# Altium PCB PIR_Sensor_Sheet_V1.3.1_Nov2023.PcbDoc
Units mm, origin at the board's own origin, x right, y up, seen from the top; angles counter-clockwise.
Board outline 292.87 x 238.1 mm, 2 copper layers (Top Layer, Bottom Layer); 15 components, 0 nets, 38 pads, 0 vias.
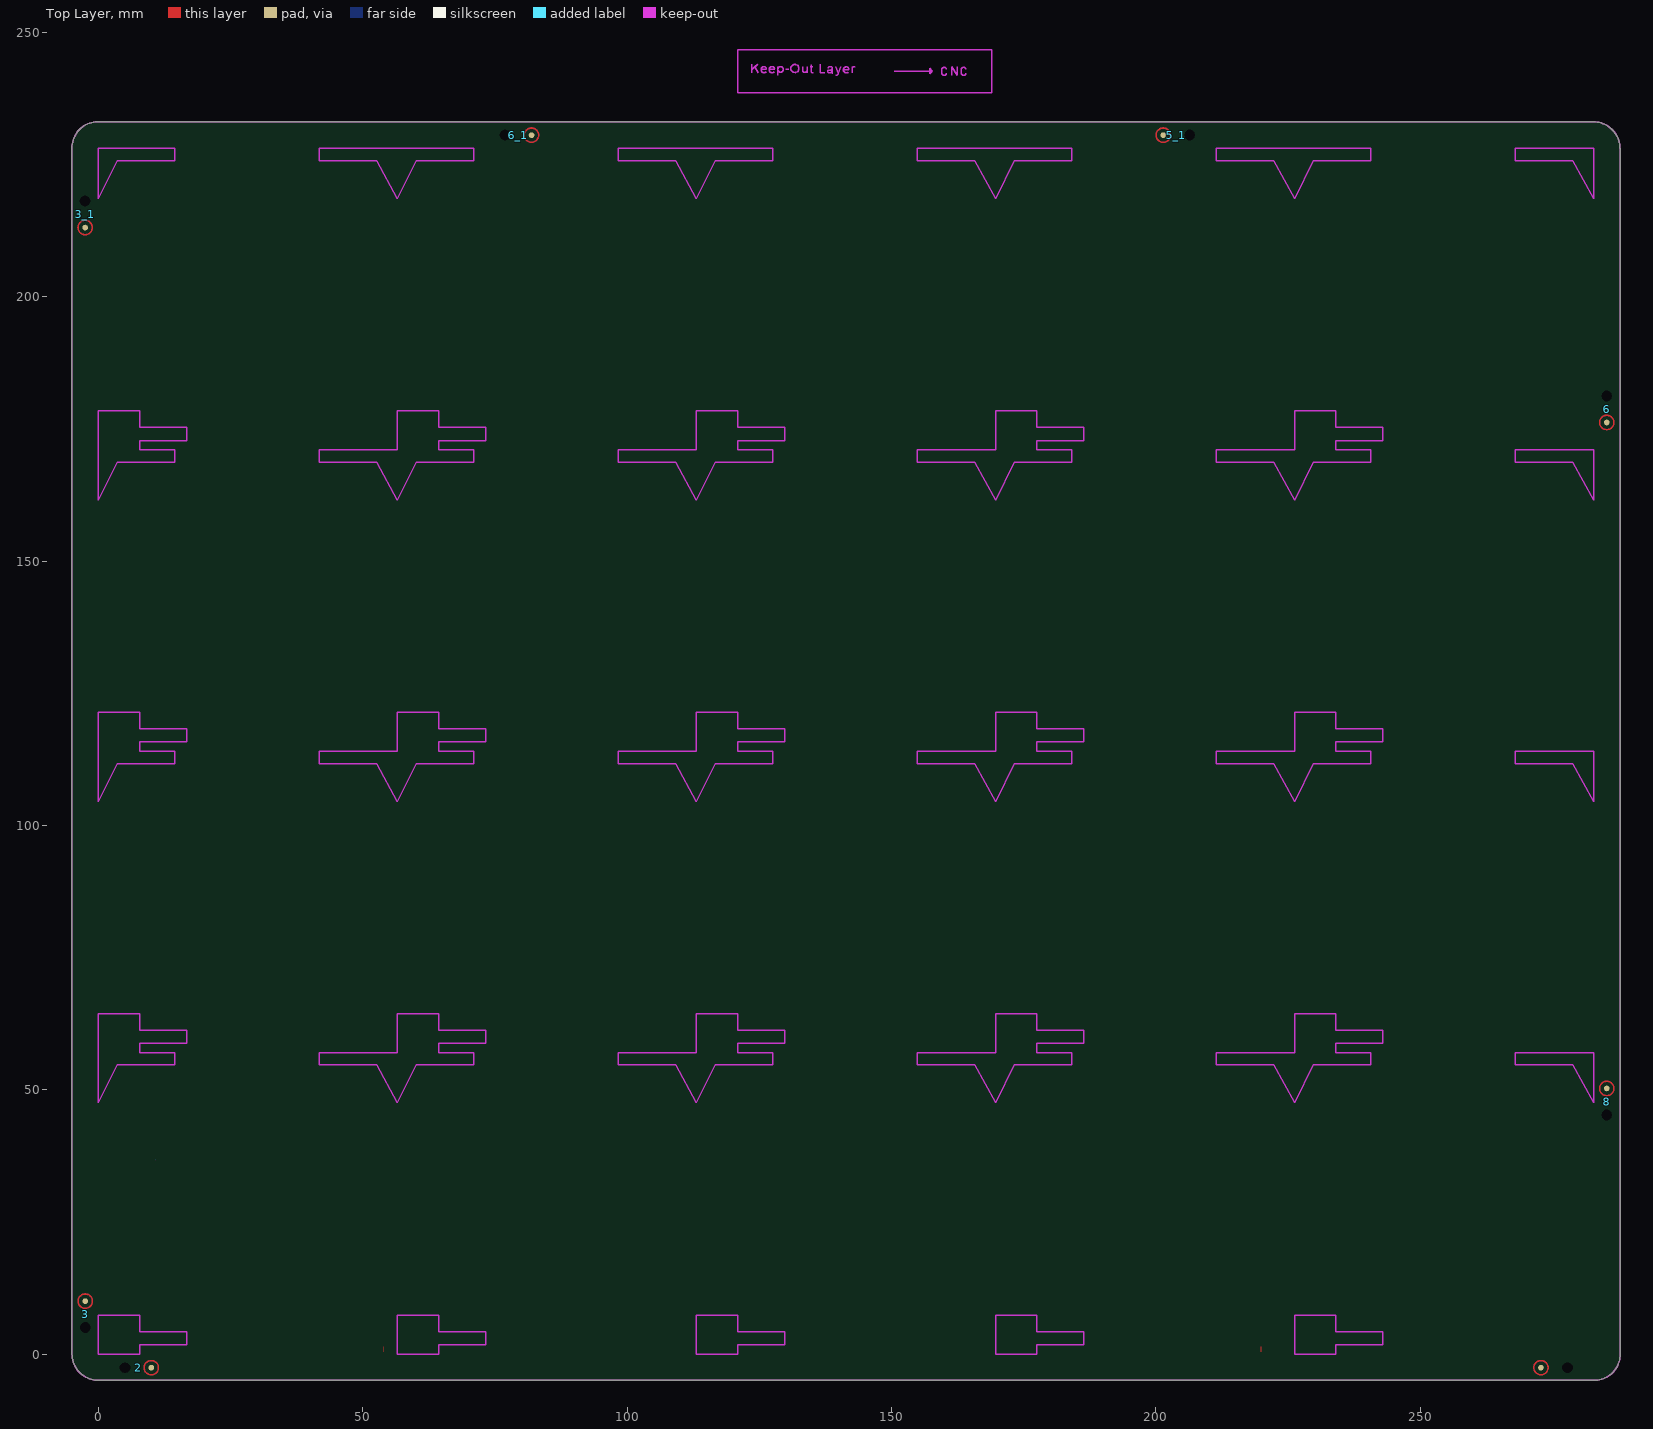
[diagram p0: Top Layer view]
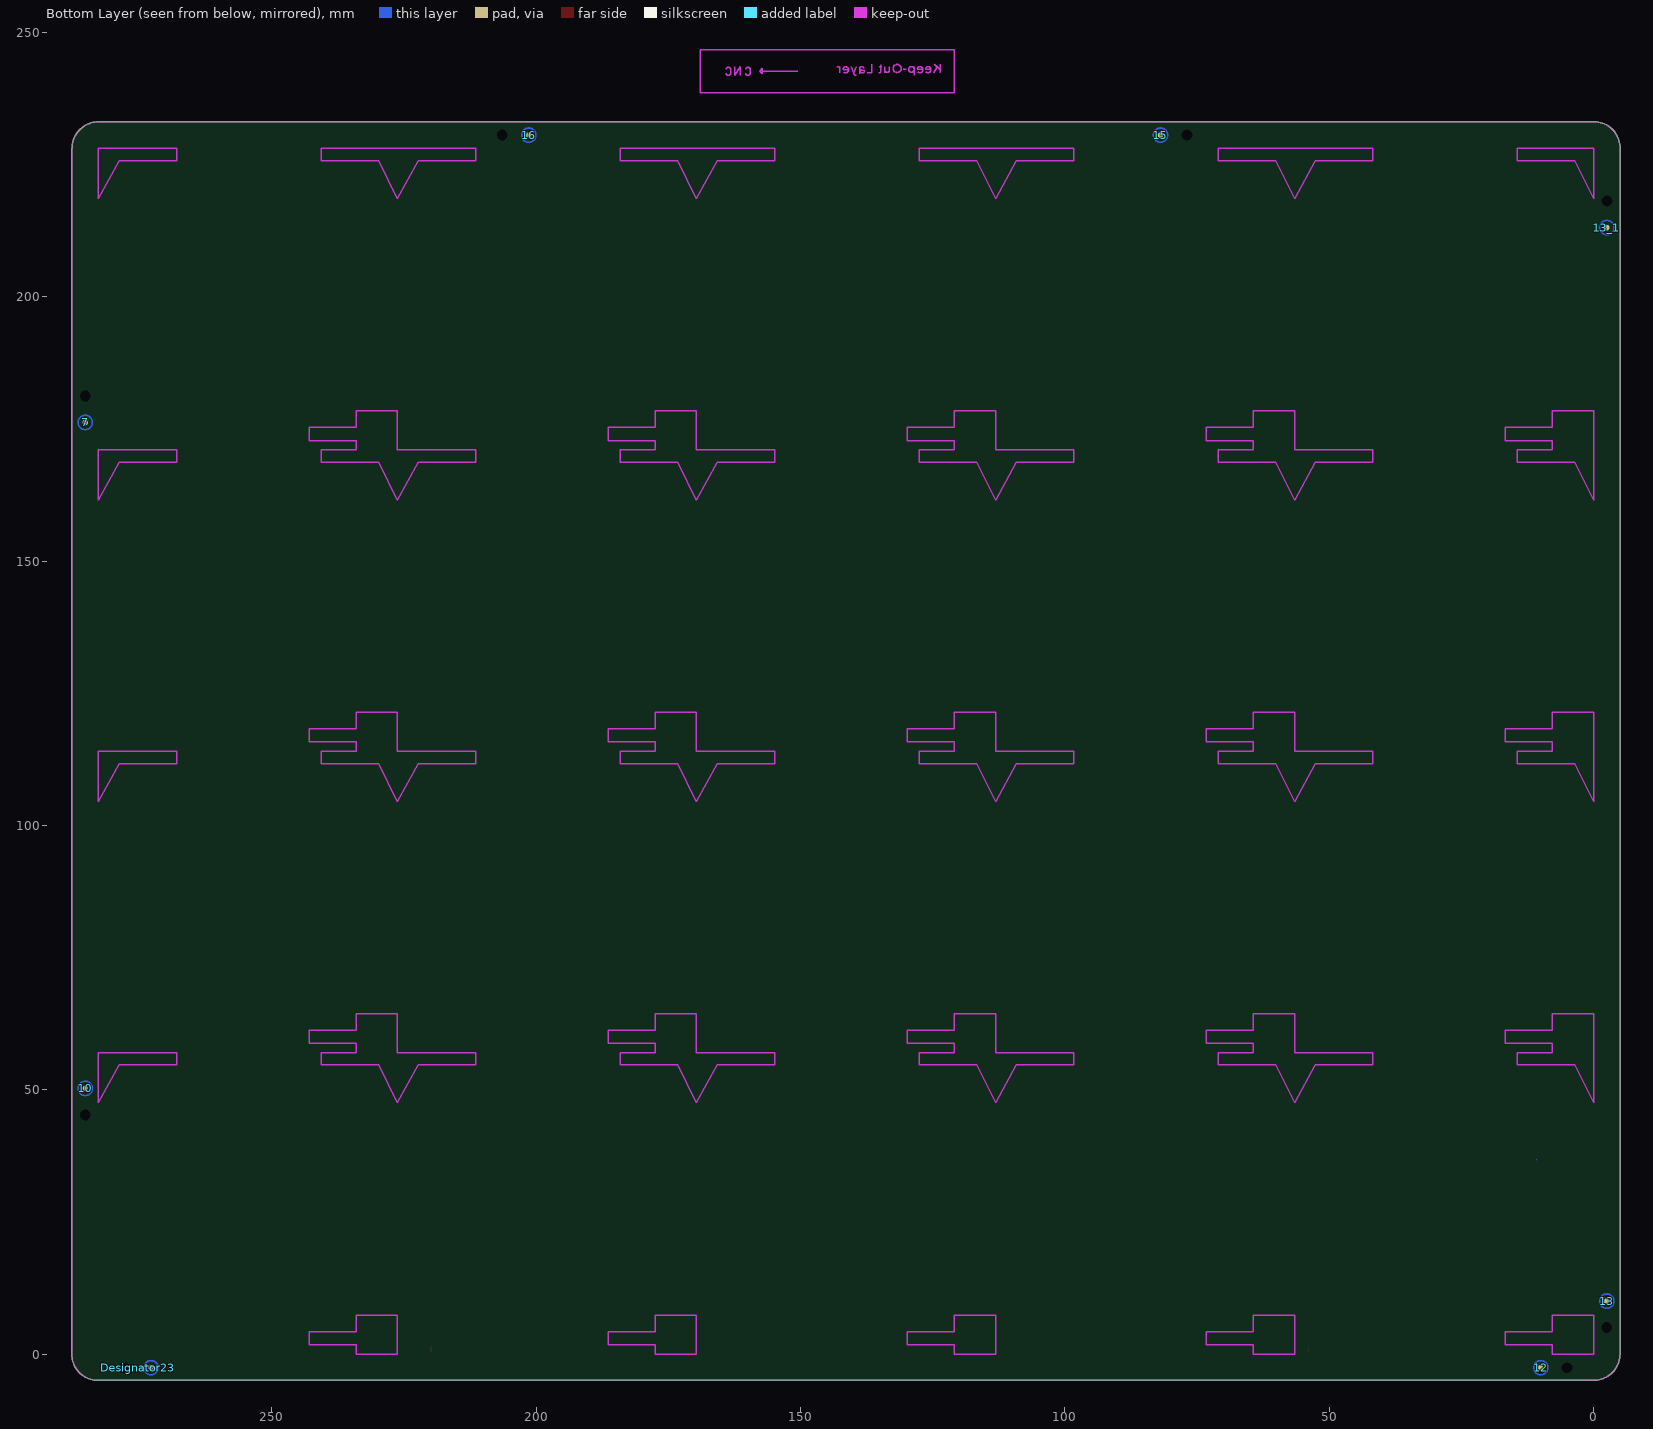
[diagram p1: Bottom Layer view, seen from below]

## Layer stack, top to bottom
Top Solder: solder mask 0.0102, Solder Resist, Dk 3.5
Top Layer: signal copper 0.0356
Dielectric 1: dielectric 0.32, FR-4, Dk 4.8
Bottom Layer: signal copper 0.0356
Bottom Solder: solder mask 0.0102, Solder Resist, Dk 3.5

## Board outline
-5.024,0 -5.024,228.092 cw(c-0.107,228.175) -0.189,233.092 282.83,233.092 282.767,233.1 cw(c282.776,228.042) 287.833,228.099 287.839,228.099 287.84,0.008 287.851,0.008 cw(c282.934,-0.075) 282.829,-4.991 282.829,-5 0.092,-5 cw(c0.034,0.058)

## Design rules (kind name [scope] priority, off if disabled: settings)
Clearance [All] p1: gap=0.254 ignorepadtopadclearanceinfootprint=FALSE except(0: Arc-Hole Track-Hole SMDPad-Hole THPad-Hole Via-Hole Fill-Hole Poly-Hole Region-Hole Text-Hole)
PolygonConnect [All] p1: connectstyle=Relief reliefconductorwidth=0.254 reliefentries=4 polygonreliefangle="90 Angle" airgapwidth=0.254
RoutingVias [All] p1: holewidth=0.711 width=1.27 viastyle="Through Hole" minholewidth=0.711 minwidth=1.27 maxholewidth=0.711 maxwidth=1.27
SolderMaskExpansion [All] p1: expansion=0.102 istentingtop=FALSE
Width [All] p1: maxlimit=0.254 minlimit=0.254 preferedwidth=0.254
30 further rules are at their usual default settings.

## Components (designator, comment, footprint, x,y, rotation, side; value= is the part's Value field where it differs from the comment)
2 "Comment" Sheet_point#1 7.455,-2.587 r270 top
3 "Comment" Sheet_point#1 -2.501,7.46 r0 top
3_1 "Comment" Sheet_point#1 -2.522,215.633 r180 top
5_1 "Comment" Sheet_point#1 203.969,230.574 r90 top
6 "Comment" Sheet_point#1 285.325,178.763 r180 top
6_1 "Comment" Sheet_point#1 79.382,230.574 r270 top
7 "Comment" Sheet_point#2 285.325,178.763 r0 bottom
8 "Comment" Sheet_point#1 285.325,47.699 r0 top
10 "Comment" Sheet_point#2 285.325,52.779 r0 bottom
12 "Comment" Sheet_point#2 9.995,-0.047 r0 bottom
13 "Comment" Sheet_point#2 -2.501,12.54 r0 bottom
13_1 "Comment" Sheet_point#2 -2.522,210.553 r180 bottom
15 "Comment" Sheet_point#2 81.922,233.114 r0 bottom
16 "Comment" Sheet_point#2 201.429,233.114 r0 bottom
Designator23 "Comment" Sheet_Set-Point 275.379,-2.587 r270 bottom

## Footprints (in the part's own frame and the unit in brackets; to place one, negate y for a bottom-side part, rotate by r counter-clockwise, add the part's x,y. Pads: shape width x height; smd on the part's side, far side on the other; paste and mask are expansions set on the pad)
Sheet_point#1 [mm]
  round 1.068 smd mask+0.102: 0(0,2.54)
  round 2.5 on Top Solder: 0(0,2.54)
  round 2.5 on Bottom Solder: 0(0,2.54)
  round 0 hole 2.05 paste-1.279 mask-0.152: 1(0,-2.46)
  Top Layer circle w0.3: c0,2.54 r1.353
Sheet_point#2 [mm]
  round 1.068 smd mask+0.102: 0(0,2.54)
  Top Layer circle w0.3: c0,2.54 r1.353
Sheet_Set-Point [mm]
  round 1.068 smd far side mask+0.65: 0(0,2.5)
  round 1.068 smd mask+0.65: 0(0,2.5)
  round 0 hole 2.05 paste-1.279 mask-0.152: 1(0,-2.5)
  Top Layer circle w0.3: c0,2.5 r1.353
  Bottom Layer circle w0.3: c0,2.5 r1.353

## Nets (pads, with @x,y where several pads share a name; then routed paths per layer and width w, separated by ;. In a path a pad name is that pad's centre, name@x,y a point inside that pad or via, vN(x,y) a via of type N, cw(c..) or ccw(c..) an arc to the next point about the centre after c; other vN are vias at no path point)
pads on no net: 2.0 2.1 3.0 3.1 3_1.0 3_1.1 5_1.0 5_1.1 6.0 6.1 6_1.0 6_1.1 7.0 8.0 8.1 10.0 12.0 13.0 13_1.0 15.0 16.0 Designator23.0 Designator23.1

## Keep-outs
Keep-Out Layer:
  circle w0.254: c131.746,243.186 r0.762
  rectangle: 157.226,242.51 157.552,242.95
  lines w0.254: 123.571,244.034 123.571,242.383 123.571,242.908 124.714,244.034 124.142,243.471 124.841,242.383 ; 126.327,242.548 cw(c125.92,242.954) 125.349,243.018 ; 127.851,242.548 cw(c127.444,242.954) 126.873,243.018 ; 128.524,241.875 128.524,243.526 ; 128.524,242.891 ccw(c129.036,243.014) 128.524,243.136 ; 130.048,243.018 130.556,243.018 ; 133.223,243.526 133.223,242.637 ccw(c133.604,243.018) 134.112,242.838 ; 134.112,242.383 134.112,243.526 ; 134.62,243.526 135.128,243.526 ; 134.874,243.907 134.874,242.51 ccw(c135.128,242.637) 135.255,242.383 ; 136.525,244.034 136.525,242.383 137.414,242.383 ; 138.049,243.272 cw(c138.303,243.272) 138.303,243.526 138.557,243.526 cw(c138.557,243.272) 138.811,243.272 ; 138.747,242.785 cw(c138.345,242.785) 138.345,242.383 138.176,242.383 cw(c138.176,242.637) 137.922,242.637 cw(c138.176,242.637) 138.176,242.891 138.43,242.891 ccw(c138.43,243.272) 138.811,243.272 ; 138.938,242.256 cw(c138.938,242.383) 138.811,242.383 138.811,243.272 ; 139.446,243.526 139.954,242.256 ; 139.468,241.875 ccw(c139.468,242.436) 139.864,242.039 ccw(c139.647,242.256) 139.954,242.256 ; 140.462,243.526 139.954,242.256 ; 141.881,242.518 cw(c141.475,242.924) 140.903,242.988 ; 142.621,242.383 142.621,243.526 ; 142.621,243.246 cw(c142.901,243.246) 143.078,243.463 ; 150.495,242.696 157.226,242.696 157.226,243.204 ; 160.401,242.256 cw(c160.02,242.256) 160.02,241.875 cw(c160.02,242.383) 159.512,242.383 159.512,242.891 cw(c160.02,242.891) 160.02,243.399 cw(c160.02,243.018) 160.401,243.018 ; 161.417,241.875 161.417,243.526 162.433,241.875 162.433,243.526 ; 164.084,242.256 cw(c163.703,242.256) 163.703,241.875 cw(c163.703,242.383) 163.195,242.383 163.195,242.891 cw(c163.703,242.891) 163.703,243.399 cw(c163.703,243.018) 164.084,243.018 ; 282.767,233.1 cw(c282.776,228.042) 287.833,228.099 ; 282.829,-5 0.092,-5 cw(c0.034,0.058) -5.024,0 -5.024,228.092 cw(c-0.107,228.175) -0.189,233.092 282.83,233.092 ; 282.829,-4.991 ccw(c282.934,-0.075) 287.851,0.008 ; 287.839,228.099 287.84,0.008 ; 0,7.337 0,0 7.823,0 7.823,1.743 16.688,1.743 16.688,4.243 7.823,4.243 7.823,7.337 0,7.337 ; 0,7.337 0,7.337 ; 0,218.551 0,218.551 ; 0,218.551 0,228.076 14.427,228.076 ; 0,218.551 3.534,225.739 14.427,225.739 14.427,228.076 ; 14.427,228.076 14.427,228.076 ; 56.566,7.337 64.389,7.337 64.389,4.243 73.254,4.243 73.254,1.743 64.389,1.743 64.389,0 56.566,0 56.566,7.337 ; 56.566,7.337 56.566,7.337 ; 113.132,7.337 120.955,7.337 120.955,4.243 129.82,4.243 129.82,1.743 120.955,1.743 120.955,0 113.132,0 113.132,7.337 ; 113.132,7.337 113.132,7.337 ; 125.349,243.018 cw(c125.92,242.954) 125.984,243.526 cw(c125.92,243.081) 126.365,243.018 125.349,243.018 ; 126.873,243.018 cw(c127.444,242.954) 127.508,243.526 cw(c127.444,243.081) 127.889,243.018 126.873,243.018 ; 140.903,242.988 cw(c141.475,242.924) 141.538,243.496 cw(c141.475,243.051) 141.919,242.988 140.903,242.988 ; 157.226,243.204 157.226,242.188 157.734,242.696 157.226,243.204 ; 169.698,7.337 169.698,0 177.521,0 177.521,1.743 186.386,1.743 186.386,4.243 177.521,4.243 177.521,7.337 169.698,7.337 ; 169.698,7.337 169.698,7.337 ; 226.264,7.337 226.264,0 234.087,0 234.087,1.743 242.952,1.743 242.952,4.243 234.087,4.243 234.087,7.337 226.264,7.337 ; 226.264,7.337 226.264,7.337 ; 0,47.494 0,64.356 7.823,64.356 7.823,61.262 16.688,61.262 16.688,58.762 7.823,58.762 7.823,57.019 14.427,57.019 14.427,54.682 3.534,54.682 0,47.494 ; 0,104.513 3.534,111.701 14.427,111.701 14.427,114.038 7.823,114.038 7.823,115.781 16.688,115.781 16.688,118.281 7.823,118.281 7.823,121.375 0,121.375 0,104.513 ; 0,161.532 3.534,168.72 14.427,168.72 14.427,171.057 7.823,171.057 7.823,172.8 16.688,172.8 16.688,175.3 7.823,175.3 7.823,178.394 0,178.394 0,161.532 ; 41.732,54.682 41.732,57.019 56.566,57.019 56.566,64.356 64.389,64.356 64.389,61.262 73.254,61.262 73.254,58.762 64.389,58.762 64.389,57.019 70.993,57.019 70.993,54.682 60.1,54.682 56.566,47.494 52.629,54.682 41.732,54.682 ; 41.732,111.701 52.629,111.701 56.566,104.513 60.1,111.701 70.993,111.701 70.993,114.038 64.389,114.038 64.389,115.781 73.254,115.781 73.254,118.281 64.389,118.281 64.389,121.375 56.566,121.375 56.566,114.038 41.732,114.038 41.732,111.701 ; 41.732,168.72 52.629,168.72 56.566,161.532 60.1,168.72 70.993,168.72 70.993,171.057 64.389,171.057 64.389,172.8 73.254,172.8 73.254,175.3 64.389,175.3 64.389,178.394 56.566,178.394 56.566,171.057 41.732,171.057 41.732,168.72 ; 41.732,225.739 41.732,228.076 70.993,228.076 70.993,225.739 60.1,225.739 56.566,218.551 52.629,225.739 41.732,225.739 ; 98.298,168.72 109.195,168.72 113.132,161.532 116.666,168.72 127.559,168.72 127.559,171.057 120.955,171.057 120.955,172.8 129.82,172.8 129.82,175.3 120.955,175.3 120.955,178.394 113.132,178.394 113.132,171.057 98.298,171.057 98.298,168.72 ; 98.298,225.739 109.195,225.739 113.132,218.551 116.666,225.739 127.559,225.739 127.559,228.076 98.298,228.076 98.298,225.739 ; 98.298,54.682 109.195,54.682 113.132,47.494 116.666,54.682 127.559,54.682 127.559,57.019 120.955,57.019 120.955,58.762 129.82,58.762 129.82,61.262 120.955,61.262 120.955,64.356 113.132,64.356 113.132,57.019 98.298,57.019 98.298,54.682 ; 98.298,111.701 109.195,111.701 113.132,104.513 116.666,111.701 127.559,111.701 127.559,114.038 120.955,114.038 120.955,115.781 129.82,115.781 129.82,118.281 120.955,118.281 120.955,121.375 113.132,121.375 113.132,114.038 98.298,114.038 98.298,111.701 ; 120.904,238.632 120.904,246.701 168.959,246.701 168.959,238.632 120.904,238.632 ; 154.864,168.72 165.761,168.72 169.698,161.532 173.232,168.72 184.125,168.72 184.125,171.057 177.521,171.057 177.521,172.8 186.385,172.8 186.385,175.3 177.521,175.3 177.521,178.394 169.698,178.394 169.698,171.057 154.864,171.057 154.864,168.72 ; 154.864,54.682 165.761,54.682 169.698,47.494 173.232,54.682 184.125,54.682 184.125,57.019 177.521,57.019 177.521,58.762 186.386,58.762 186.386,61.262 177.521,61.262 177.521,64.356 169.698,64.356 169.698,57.019 154.864,57.019 154.864,54.682 ; 154.864,111.701 165.761,111.701 169.698,104.513 173.232,111.701 184.125,111.701 184.125,114.038 177.521,114.038 177.521,115.781 186.385,115.781 186.385,118.281 177.521,118.281 177.521,121.375 169.698,121.375 169.698,114.038 154.864,114.038 154.864,111.701 ; 154.864,225.739 165.761,225.739 169.698,218.551 173.232,225.739 184.125,225.739 184.125,228.076 154.864,228.076 154.864,225.739 ; 211.43,54.682 222.327,54.682 226.264,47.494 229.798,54.682 240.691,54.682 240.691,57.019 234.087,57.019 234.087,58.762 242.952,58.762 242.952,61.262 234.087,61.262 234.087,64.356 226.264,64.356 226.264,57.019 211.43,57.019 211.43,54.682 ; 211.43,111.701 222.327,111.701 226.264,104.513 229.798,111.701 240.691,111.701 240.691,114.038 234.087,114.038 234.087,115.781 242.952,115.781 242.952,118.281 234.087,118.281 234.087,121.375 226.264,121.375 226.264,114.038 211.43,114.038 211.43,111.701 ; 211.43,168.72 222.327,168.72 226.264,161.532 229.798,168.72 240.691,168.72 240.691,171.057 234.087,171.057 234.087,172.8 242.952,172.8 242.952,175.3 234.087,175.3 234.087,178.394 226.264,178.394 226.264,171.057 211.43,171.057 211.43,168.72 ; 211.43,225.739 222.327,225.739 226.264,218.551 229.798,225.739 240.691,225.739 240.691,228.076 211.43,228.076 211.43,225.739 ; 267.996,54.682 278.892,54.682 282.829,47.494 282.83,57.019 267.996,57.019 267.996,54.682 ; 267.996,111.701 278.892,111.701 282.829,104.513 282.83,114.038 267.996,114.038 267.996,111.701 ; 267.995,168.72 278.892,168.72 282.829,161.532 282.83,171.057 267.995,171.057 267.995,168.72 ; 267.995,225.739 267.995,228.076 282.83,228.076 282.829,218.551 278.892,225.739 267.995,225.739

## Silkscreen, mask and mechanical layers (free items; w line width, h text height)
Top Overlay:
Bottom Overlay:
Mechanical 15:
  rectangle: 157.43,250.895 157.612,251.382
  lines w0.254: -5.024,0 287.849,0 ; -4.995,57.019 287.866,57.019 ; -4.995,114.038 287.865,114.038 ; -4.995,171.057 287.865,171.057 ; -4.995,228.076 287.865,228.076 ; 0,-5 0,233.092 ; 56.566,233.092 56.566,-5 ; 113.132,233.092 113.132,-5 ; 150.627,251.128 157.866,251.128 ; 169.698,-5 169.698,233.092 ; 226.264,-5 226.264,233.092 ; 282.829,-5 282.83,233.1 ; 157.866,251.128 157.358,251.636 157.358,250.62 157.866,251.128 ; 120.904,247.132 120.904,255.202 168.959,255.202 168.959,247.132 120.904,247.132
  text "Mechanical 15 Layer" at 123.493,250.678 h3
  text "V-Cut" at 159.434,250.145 h3

## Panel: embedded boards
"PIR_Sensor_Output_V1.3.1_Nov2023_1402.06.05.PcbDoc" at 0,0, 4 rows x 5 columns, spacing 57.019 x 56.566, rotation 0